# Allegro board board6DF.brd
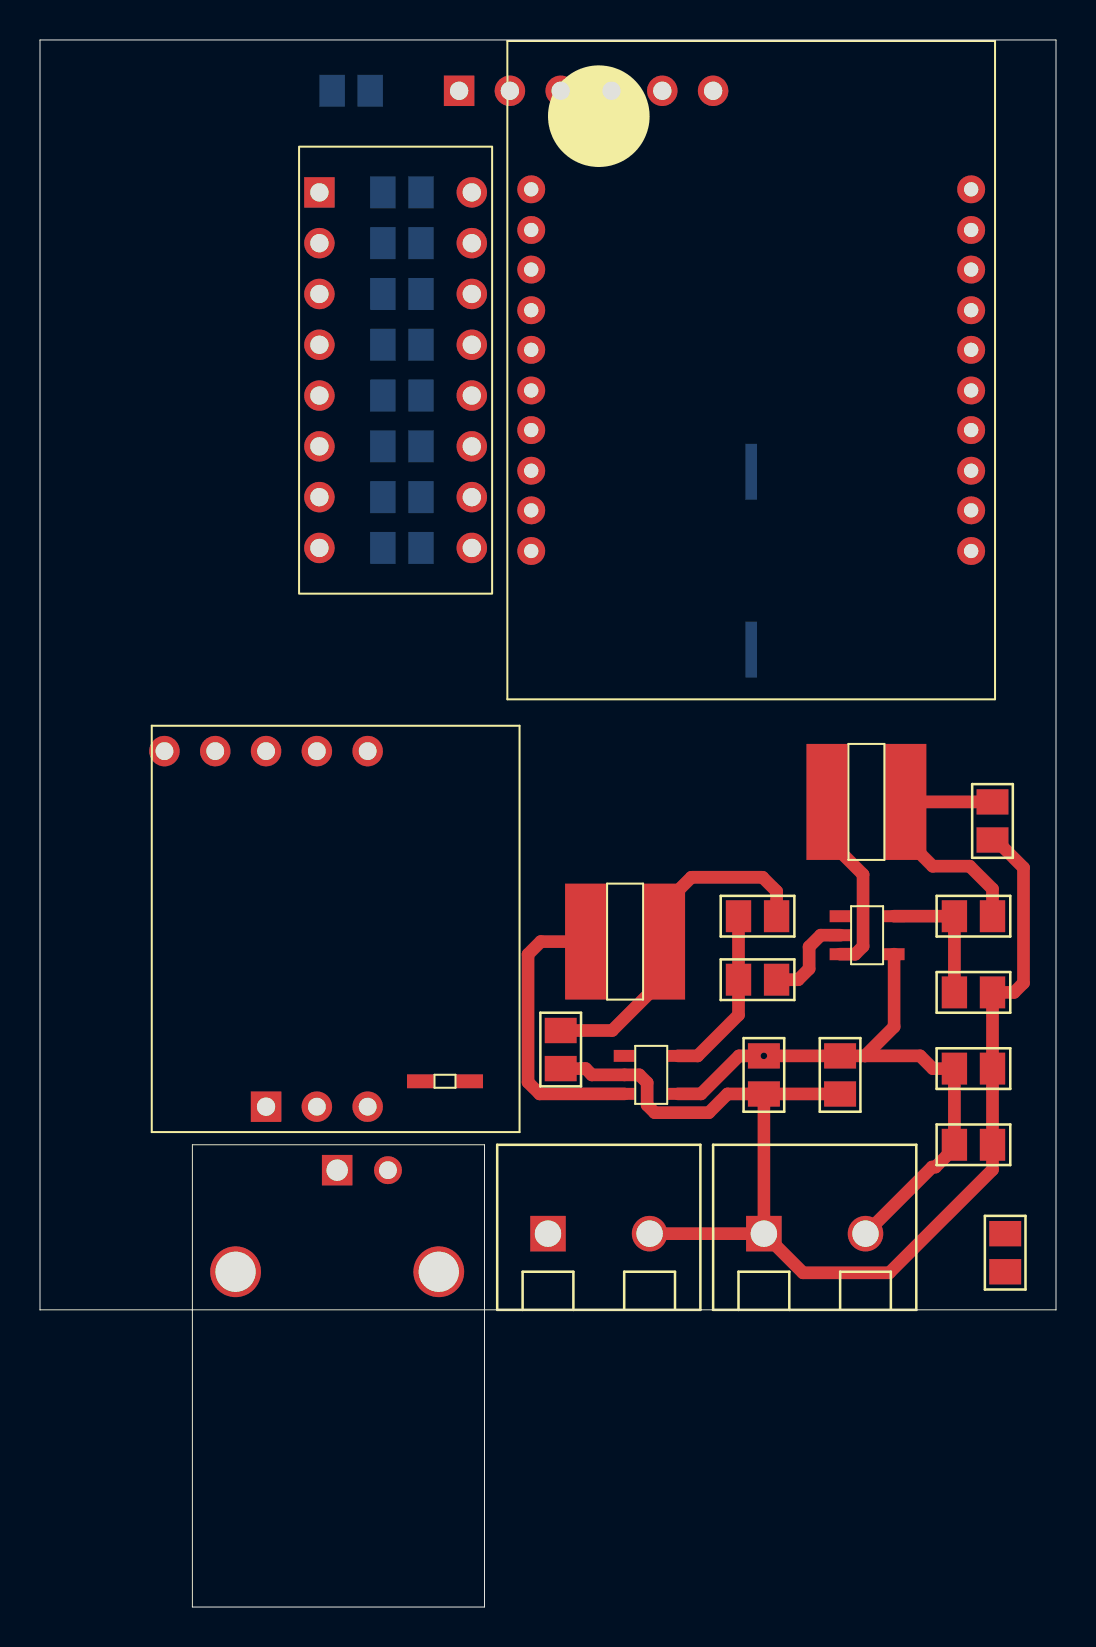
[diagram p0: board, top side]
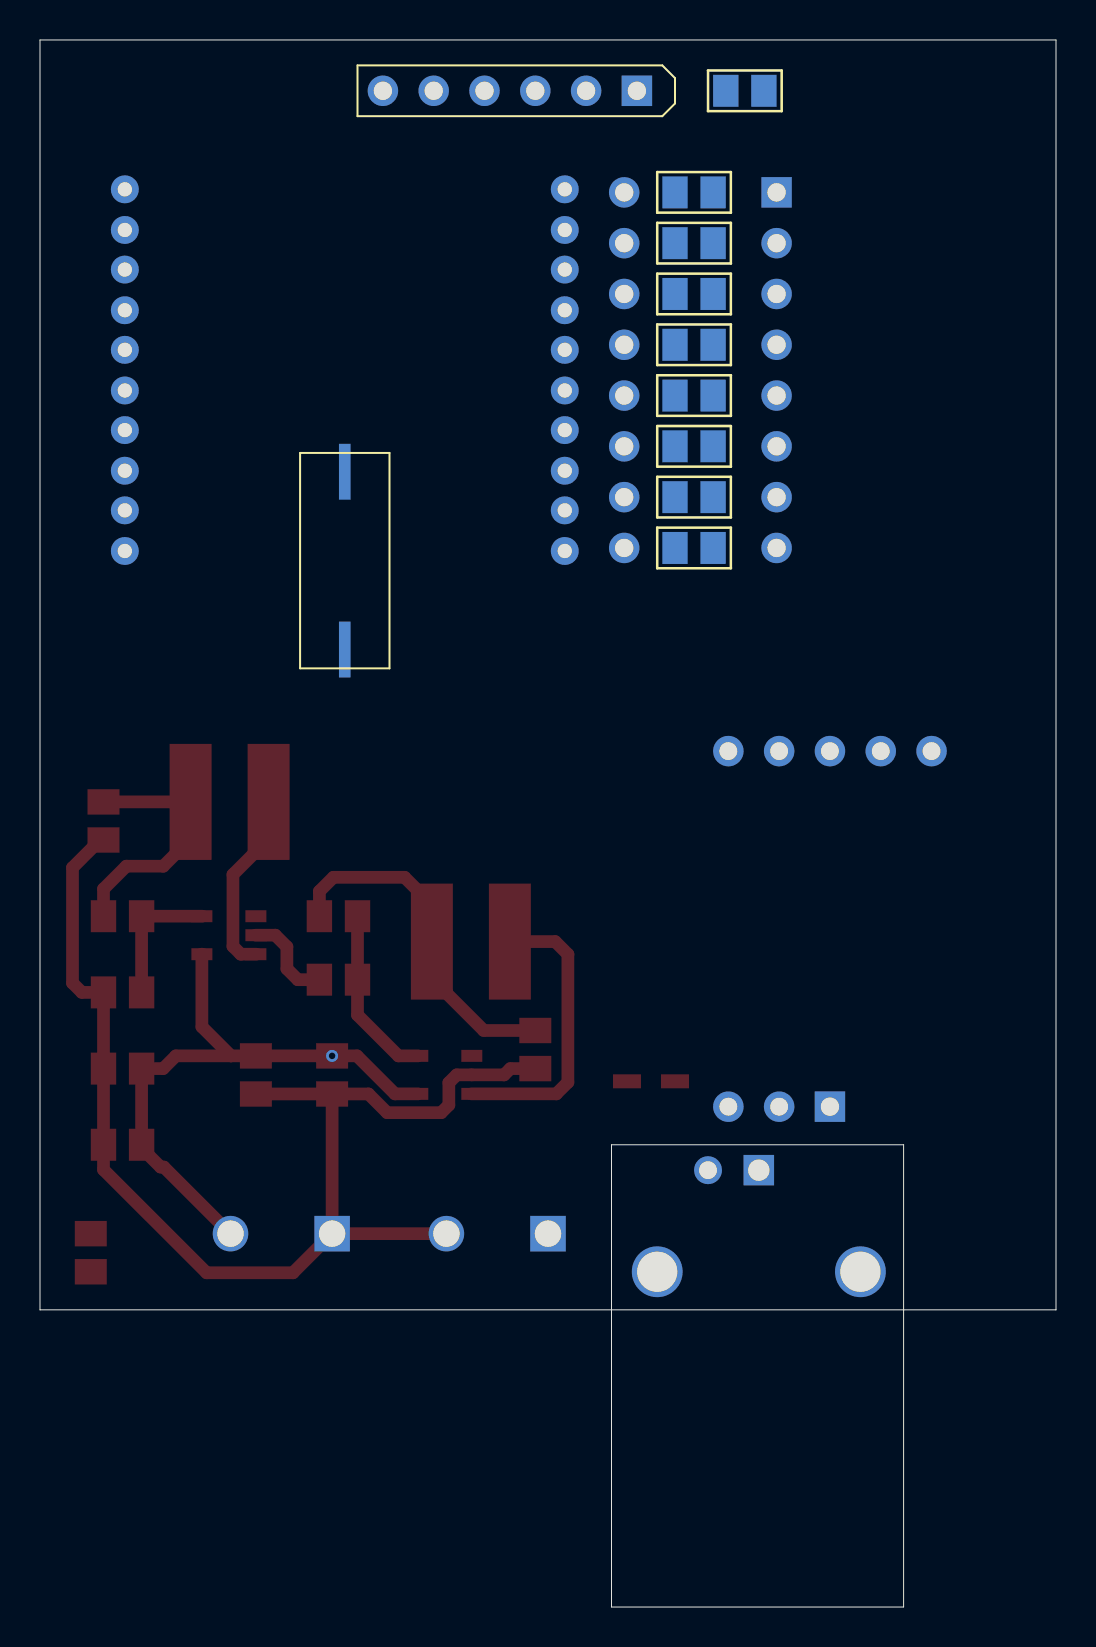
[diagram p1: board, bottom side, seen from below]

Outline 50.8 x 78.36 mm; copper layers: TOP, BOTTOM. Coordinates in mm from the lower left corner of the outline.
Outline path: 0,78.36 50.8,78.36 50.8,14.86 0,14.86 0,78.36

## Design rules (mm)
nets with their own width: min track width 0.635; nets 3.3V 5V 6A9V(PILE) GND N82912 N83047 N88127 N88155

## Placement (name value [footprint] x y rotation side)
C1  10uF  [C_0805]  47.62 26.92 180 top
C2  100nF  [C_0805]  47.62 23.11 180 top
C3  10uF  [C_0805]  47.62 38.35 90 top
C4  10uF  [C_0805]  36.2 25.65 90 top
C5  100nF  [C_0805]  40 25.65 90 top
C6  22uF  [C_0805]  26.04 26.92 90 top
D1  Vz 6V  [DIODESOD323]  19.05 26.29 0 top
J1  HEADER 2  [CONNECTEUR_2_200]  36.2 18.67 0 top
J2  Convertion Board  [CONDUCTIVITY_SENSOR]  5.59 23.75 90 top
J3  BNC au capteur  [CONNECTEUR_BNC]  7.62 23.11 270 top
J4  Xbee  [XBEE]  35.56 61.85 0 top
J5  Connecteur PicKit  [SIP6]  20.95 75.82 270 bottom
J6  contact eau  [CONNECTEUR_2_200]  25.4 18.67 0 top
L1  10uH  [BOBINE10U100MH]  39.37 40.26 0 top
L2  10uH  [BOBINE10U100MH]  27.3 33.27 0 top
R1  105K  [R_0805]  45.72 34.54 0 top
R2  20K  [R_0805]  47.62 30.73 180 top
R3  61.9K  [R_0805]  34.92 34.54 0 top
R4  20K  [R_0805]  36.83 31.37 180 top
R5  4.7K  [R_0805]  14.6 75.82 0 bottom
R6  10K  [R_0805]  48.26 18.67 270 top
R7  10K  [R_0805]  17.14 70.74 0 bottom
R8  10K  [R_0805]  17.14 68.2 0 bottom
R9  10K  [R_0805]  17.14 65.66 0 bottom
R10  10K  [R_0805]  17.14 63.12 0 bottom
R11  10K  [R_0805]  17.14 60.58 0 bottom
R12  10K  [R_0805]  17.14 58.04 0 bottom
R13  10K  [R_0805]  17.14 55.5 0 bottom
R14  10K  [R_0805]  17.14 52.96 0 bottom
SW1  SW DIP-8  [DIPSWITCH]  13.97 70.74 0 top
U1  LM104/TO  [TPS560200]  40 34.54 0 top
U2  LM104/TO  [TPS560200]  29.21 27.56 0 top
Y1  4Mhz CRYSTAL  [CRYSTAL_SMD]  35.56 52.32 270 bottom

## Library data of the parts
C1-C6 = C
D1 = DIODE ZENER
J1 = HEADER 2_1
J2 = HEADER 3X2_3
J3 = BNC
J4 = HEADER 11X2_1
J5 = HEADER 6_0: User Part Number: ***
J6 = HEADER 2
L1 L2 = INDUCTOR
R1-R4 R6-R14 = R
R5 = RESISTOR
SW1 = SW DIP-8: User Part Number: ***
U1 U2 = LM104/TO_3
Y1 = CRYSTAL

## Footprints (pads in the part's own frame, mm; a bottom-side part is the same pattern mirrored in y, then rotated)
BOBINE10U100MH
  rect 2.1x5.8 smd: 1(0,0) 2(3.9,0)
C_0805
  rect 1.27x1.6 smd: 1(0,0) 2(1.905,0)
CONDUCTIVITY_SENSOR
  rect 1.524x1.524 hole 0.914: 1(1.27,-5.715)
  round 1.524 hole 0.889: 2(1.27,-8.255) 3(1.27,-10.795) 4(19.05,-10.795) 5(19.05,-8.255) 6(19.05,-5.715) 7(19.05,-3.175) 8(19.05,-0.635)
CONNECTEUR_2_200
  rect 1.778x1.778 hole 1.321: 1(0,0)
  round 1.778 hole 1.321: 2(5.08,0)
CONNECTEUR_BNC
  round 2.54 hole 2.007: (6.35,12.319) (6.35,2.159)
  rect 1.524x1.524 hole 1.067: 1(1.27,7.239)
  round 1.397 hole 0.889: 2(1.27,9.779)
CRYSTAL_SMD
  rect 2.794x0.584 smd: 1(-4.445,0) 2(4.445,0)
DIODESOD323
  rect 1.4x0.7 smd: 1(0,0) 2(2.4,0)
DIPSWITCH
  rect 1.524x1.524 hole 0.914: 1(0,0)
  round 1.524 hole 0.914: 2(0,-2.54) 3(0,-5.08) 4(0,-7.62) 5(0,-10.16) 6(0,-12.7) 7(0,-15.24) 8(0,-17.78) 9(7.62,-17.78) 10(7.62,-15.24) 11(7.62,-12.7) 12(7.62,-10.16) 13(7.62,-7.62) 14(7.62,-5.08) 15(7.62,-2.54) 16(7.62,0)
R_0805
  rect 1.27x1.6 smd: 1(0,0) 2(1.905,0)
SIP6
  rect 1.524x1.524 hole 0.914: 1(0,0)
  round 1.524 hole 0.914: 2(0,-2.54) 3(0,-5.08) 4(0,-7.62) 5(0,-10.16) 6(0,-12.7)
TPS560200
  rect 1.05x0.6 smd: 1(0,0) 2(0,-0.95) 3(0,-1.9) 4(2.7,-1.9) 5(2.7,0)
XBEE
  round 1.397 hole 0.711: 1(-10.998,9.042) 2(-10.998,7.01) 3(-10.998,5.029) 4(-10.998,2.997) 5(-10.998,1.016) 6(-10.998,-1.016) 7(-10.998,-2.997) 8(-10.998,-5.029) 9(-10.998,-7.01) 10(-10.998,-9.042) 11(10.998,-9.042) 12(10.998,-7.01) 13(10.998,-5.029) 14(10.998,-2.997) 15(10.998,-1.016) 16(10.998,1.016) 17(10.998,2.997) 18(10.998,5.029) 19(10.998,7.01) 20(10.998,9.042)

## Nets
3.3V: C6.2 J2.1 J4.1 J5.2 L2.2 R3.2 R5.1 R6.1 R7.2 R8.2 R9.2 R10.2 R11.2 R12.2 R13.2 R14.2
5V: C3.2 L1.2 R1.2
GND: C1.1 C2.1 C3.1 C4.1 C5.1 C6.1 J1.1 J2.4(GND) J4.10 J5.3 J6.2 R2.1 R4.1 SW1.9(B8) SW1.10(B7) SW1.11(B6) SW1.12(B5) SW1.13(B4) SW1.14(B3) SW1.15(B2) SW1.16(B1) U1.2(GND) U2.2(GND)
6A9V(PILE): C1.2 C2.2 C4.2 C5.2 D1.1(CATHODE) J1.2 U1.4(VIN) U2.4(VIN)
CAPTEURRX: J2.6
CAPTEURTX: J2.5
CELL7: J2.7
CELL8: J2.8
ENABLE POWER: U2.1(EN)
ENABLE POWER5V: U1.1(EN)
XBEEDIN: J4.3
XBEEDOUT: J4.2
XBEERESET: J4.5
XBEESLEEP: J4.9
N45221: J5.5
N45265: J5.4
N45305: J5.1 R5.2
N56544: R7.1 SW1.1(A1)
N56546: R8.1 SW1.2(A2)
N56548: R9.1 SW1.3(A3)
N56550: R10.1 SW1.4(A4)
N56552: R11.1 SW1.5(A5)
N56554: R12.1 SW1.6(A6)
N56556: R13.1 SW1.7(A7)
N56558: R14.1 SW1.8(A8)
N61373: J2.2 J3.1(CENTER)
N61405: J2.3 J3.2(SHIELD)
N78069: Y1.2
N78169: Y1.1
N80519: J6.1 R6.2
N81598: D1.2(ANODE)
N82912: R3.1 R4.2 U2.5(VSENSE)
N83047: L2.1 U2.3(PH)
N88127: R1.1 R2.2 U1.5(VSENSE)
N88155: L1.1 U1.3(PH)

Pads without a net: J4 4 6 7 8 11 12 13 14 15 16 17 18 19 20; J5 6

## Via types
v1: diameter 0.61, hole 0.33, TOP to BOTTOM, 1 via

## Routing (per net, layer and track width the routed paths; a pad name or vN(x,y) marks a point on that pad's centre or on a via; arc(x,y) is an arc through that point)
3.3V: length 17.7
  TOP w0.635: R3.2 36.83,35.79 36.13,36.49 32.57,36.49 31.2,35.12 L2.2 31.2,31.42 28.61,28.83 C6.2
5V: length 13
  TOP w0.635: C3.2 L1.2 43.27,38.41 44.63,37.04 46.48,37.04 47.62,35.9 R1.2
GND: length 66.2
  TOP w0.635: J1.1 C4.1 ; J1.1 38.15,16.71 42.47,16.71 47.62,21.87 C2.1 C1.1 R2.1 48.7,30.73 49.17,31.2 49.17,36.97 47.79,38.35 C3.1 ; J1.1 J6.2 ; C4.1 C5.1 ; C4.1 34.37,25.65 33.44,24.72 30.74,24.72 30.36,25.1 30.36,26.22 29.97,26.61 U2.2 27.59,26.61 27.28,26.92 C6.1 ; R4.1 37.91,31.37 38.46,31.92 38.46,33.01 39.04,33.59 U1.2
6A9V(PILE): length 30.7
  TOP w0.635: 41.25,27.56 42.71,29.01 U1.4 ; 41.25,27.56 C5.2 v1(36.2,27.56) 34.95,27.56 33.05,25.66 U2.4 ; 41.25,27.56 44.01,27.56 44.64,26.92 C1.2 C2.2 45.72,22.95 44.77,22 44.61,22 J1.2
N82912: length 8.8
  TOP w0.635: U2.5 32.88,27.56 34.92,29.6 R4.2 R3.1
N83047: length 14.6
  TOP w0.635: U2.3 24.98,25.66 24.4,26.24 24.4,32.64 25.04,33.27 L2.1
N88127: length 6.8
  TOP w0.635: R2.2 R1.1 U1.5
N88155: length 9.3
  TOP w0.635: U1.3 40.76,32.64 41.15,33.04 41.15,36.63 39.37,38.41 L1.1
